# EAGLE board prot_PBC (EAGLE 6.0)
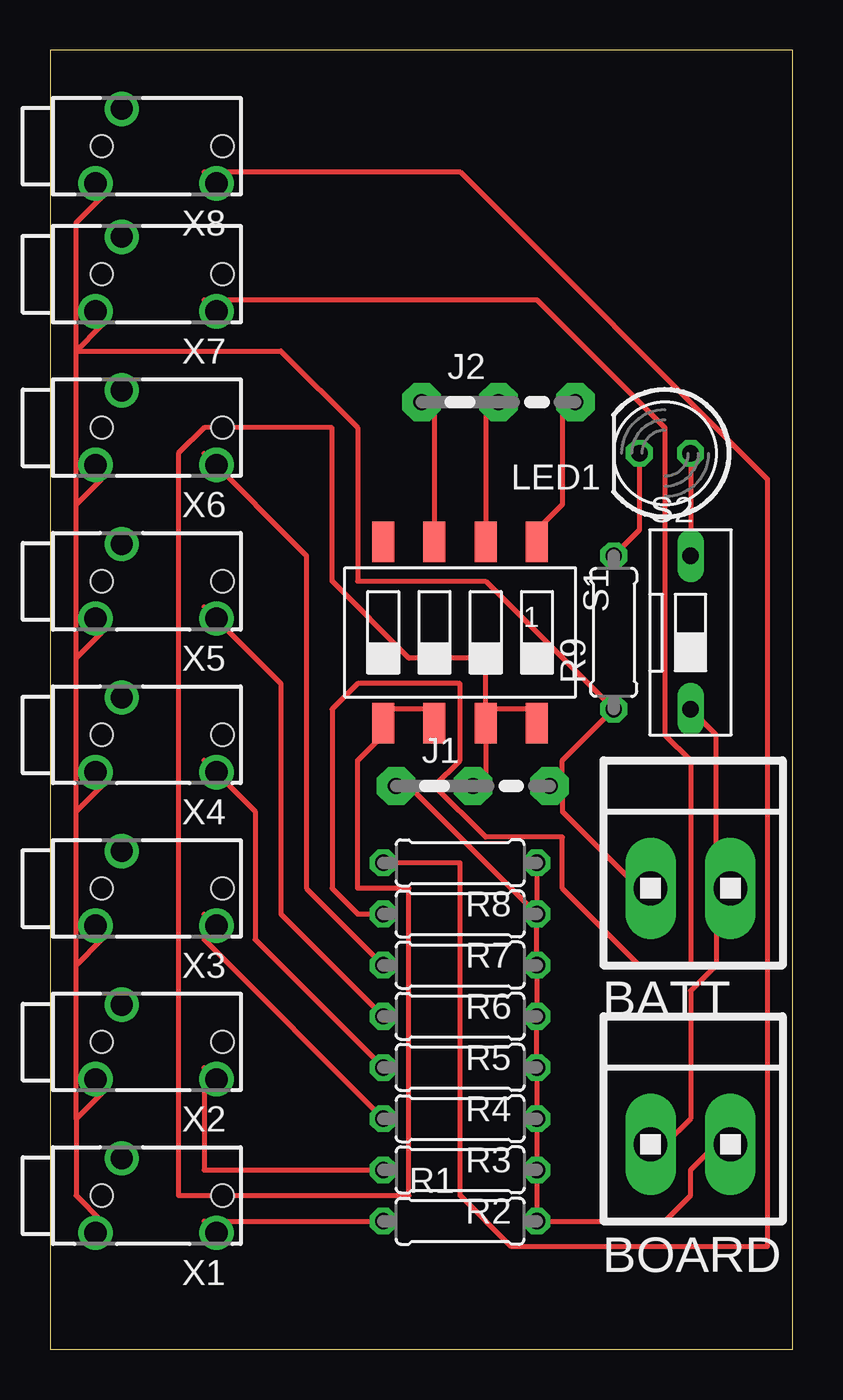
[diagram p0: board, top side]

Size 36.81 x 64.44 mm. Coordinates in mm from the lower left corner, seen from the top.
Outline: 0,0 36.81,0 36.81,64.44 0,64.44 0,0
Copper layers (1*16): Top 0.035mm / dielectric 1.5mm / Bottom 0.035mm
Design rules: minimum track width 10mil, minimum drill 24mil, track to track 8mil, track to pad 8mil, pad to pad 8mil, via to via 8mil, smd to smd 8mil, copper to edge 40mil, drill to drill 8mil, minimum pad ring 10mil, minimum via ring 8mil, stop-mask expansion 4mil, vias tented up to drill 0mil, thermal gap 10mil

## Footprints (pad centres in the part's own frame; a part is rotated, then mirrored left to right if it is on the bottom)
1X2MTA = drill 1.676 long: 1 1.981,0; 2 -1.981,0
04C = drill 0.813 pad 1.905 octagon: 1 -1.905,0; 2 1.905,0; 3 5.715,0
LED5MM = drill 0.813 octagon: A -1.27,0; K 1.27,0
0207/7 = drill 0.813 octagon: 1 -3.81,0; 2 3.81,0
SMS-004 = smd 1.092 x 2.007: 1 -3.81,-4.496; 2 -1.27,-4.496; 3 1.27,-4.496; 4 3.81,-4.496; 5 3.81,4.496; 6 1.27,4.496; 7 -1.27,4.496; 8 -3.81,4.496
DS-01 = drill 0.813 long: 1 0,-3.81; 2 0,3.81
1501_03 = drill 1.1 pad 1.7: 1 -1.85,0.3; 2 1.85,-1; 3 -1.85,-5.7 | hole 1.1: 0,0; 0,-6

## Placement (x,y rotation side)
BATT  [1X2MTA]  31.75,22.86 0 top
BOARD  [1X2MTA]  31.75,10.16 0 top
J1  [04C]  19.05,27.94 0 top
J2  [04C]  20.32,46.99 0 top
LED1  [LED5MM]  30.48,44.45 180 top
R1  22K  [0207/7]  20.32,6.35 0 top
R2  22K  [0207/7]  20.32,8.89 180 top
R3  22K  [0207/7]  20.32,11.43 180 top
R4  22K  [0207/7]  20.32,13.97 180 top
R5  22K  [0207/7]  20.32,16.51 180 top
R6  22K  [0207/7]  20.32,19.05 180 top
R7  22K  [0207/7]  20.32,21.59 180 top
R8  22K  [0207/7]  20.32,24.13 180 top
R9  1K  [0207/7]  27.94,35.56 90 top
S1  SWS004  [SMS-004]  20.32,35.56 180 top
S2  [DS-01]  31.75,35.56 0 top
X1  [1501_03]  2.54,7.62 90 top
X2  [1501_03]  2.54,15.24 90 top
X3  [1501_03]  2.54,22.86 90 top
X4  [1501_03]  2.54,30.48 90 top
X5  [1501_03]  2.54,38.1 90 top
X6  [1501_03]  2.54,45.72 90 top
X7  [1501_03]  2.54,53.34 90 top
X8  [1501_03]  2.54,59.69 90 top

## Library data of the parts
BATT BOARD = con-amp
J1 J2 = jumper
LED1 = led
R1-R9 = resistor
S1 = smd-special
S2 = switch-dil; OC_FARNELL: unknown; OC_NEWARK: unknown
X1-X8 = con-lumberg; OC_FARNELL: 1200127; OC_NEWARK: unknown

## Nets
ADC_0: R1.1 X1.3
ADC_1: R2.2 X2.3
ADC_2: R3.2 X3.3
ADC_3: R4.2 X4.3
ADC_4: R5.2 X5.3
ADC_6: R6.2 X6.3
ADC_7: R7.2 X7.3
ADC_8: R8.2 X8.3
ADD_0: J2.3 S1.1
ADD_1: J2.2 S1.2
ADD_2: J2.1 S1.3
GND: BATT.2 J1.3 R9.1 X1.1 X2.1 X3.1 X4.1 X5.1 X6.1 X7.1 X8.1
N$1: LED1.K R9.2
N$2: LED1.A S2.2
VCC: BOARD.1 J1.1 R1.2 R2.1 R3.1 R4.1 R5.1 R6.1 R7.1 R8.1
VCC1: BATT.1 BOARD.2 S2.1
VCC/GND: J1.2 S1.5 S1.6 S1.7 S1.8

## Tracks (layer width: path | path; a pad name or v marks a point on that pad's centre or on a via)
ADC_0
  Top 0.254: R1.1 7.62,6.35 X1.3
ADC_1
  Top 0.254: R2.2 7.62,8.89 7.62,13.97 X2.3
ADC_2
  Top 0.254: R3.2 7.62,20.32 7.62,21.59 X3.3
ADC_3
  Top 0.254: R4.2 10.16,20.32 10.16,26.67 7.62,29.21 X4.3
ADC_4
  Top 0.254: R5.2 11.43,21.59 11.43,33.02 7.62,36.83 X5.3
ADC_6
  Top 0.254: R6.2 12.7,22.86 12.7,39.37 7.62,44.45 X6.3
ADC_7
  Top 0.254: R7.2 15.24,21.59 13.97,22.86 13.97,31.75 15.24,33.02 20.32,33.02 20.32,29.21 19.05,27.94 21.59,25.4 25.4,25.4 25.4,22.86 29.21,19.05 31.75,19.05 31.75,29.21 30.48,30.48 30.48,45.72 24.13,52.07 7.62,52.07 X7.3
ADC_8
  Top 0.254: R8.2 20.32,24.13 20.32,7.62 22.86,5.08 35.56,5.08 35.56,43.18 20.32,58.42 7.62,58.42 X8.3
ADD_0
  Top 0.254: S1.1 24.13,40.64 25.4,41.91 25.4,46.99 J2.3
ADD_1
  Top 0.254: S1.2 21.59,46.99 J2.2
ADD_2
  Top 0.254: S1.3 19.05,46.99 J2.1
GND
  Top 0.254: 25.4,27.94 25.4,29.21 R9.1 21.59,38.1 15.24,38.1 15.24,45.72 11.43,49.53 1.27,49.53 | 25.4,27.94 25.4,26.67 29.21,22.86 BATT.2 | 25.4,27.94 J1.3 | 1.27,11.43 1.27,7.62 2.54,6.35 X1.1 | 1.27,11.43 2.54,12.7 X2.1 | 1.27,19.05 2.54,20.32 X3.1 | 1.27,11.43 1.27,19.05 | 1.27,26.67 2.54,27.94 X4.1 | 1.27,19.05 1.27,26.67 | 1.27,34.29 2.54,35.56 X5.1 | 1.27,26.67 1.27,34.29 | 1.27,41.91 2.54,43.18 X6.1 | 1.27,34.29 1.27,41.91 | 1.27,49.53 2.54,50.8 X7.1 | 1.27,41.91 1.27,49.53 | 1.27,49.53 1.27,55.88 2.54,57.15 X8.1
N$1
  Top 0.254: R9.2 29.21,40.64 LED1.K
N$2
  Top 0.254: LED1.A S2.2
VCC
  Top 0.254: R8.1 R7.1 | R7.1 R6.1 R5.1 R4.1 R3.1 R2.1 R1.2 30.48,6.35 31.75,7.62 31.75,8.89 33.02,10.16 BOARD.1 | R7.1 17.78,27.94 J1.1
VCC1
  Top 0.254: S2.1 33.02,30.48 33.02,22.86 | 33.02,22.86 33.02,19.05 31.75,17.78 31.75,11.43 30.48,10.16 BOARD.2 | 33.02,22.86 BATT.1
VCC/GND
  Top 0.254: S1.6 19.05,31.75 16.51,31.75 S1.5 16.51,30.48 15.24,29.21 15.24,22.86 17.78,22.86 17.78,7.62 6.35,7.62 6.35,44.45 7.62,45.72 13.97,45.72 13.97,38.1 17.78,34.29 21.59,34.29 21.59,31.75 | 21.59,31.75 24.13,31.75 S1.8 | 21.59,31.75 S1.7 21.59,27.94 J1.2